# Altium PCB WS2812B灯板.PcbDoc (part 1 of 2)
Units mm, origin at the board's own origin, x right, y up, seen from the top; angles counter-clockwise.
Board outline 76.86 x 65 mm, 2 copper layers (Top Layer, Bottom Layer); 100 components, 337 nets, 606 pads, 0 vias.
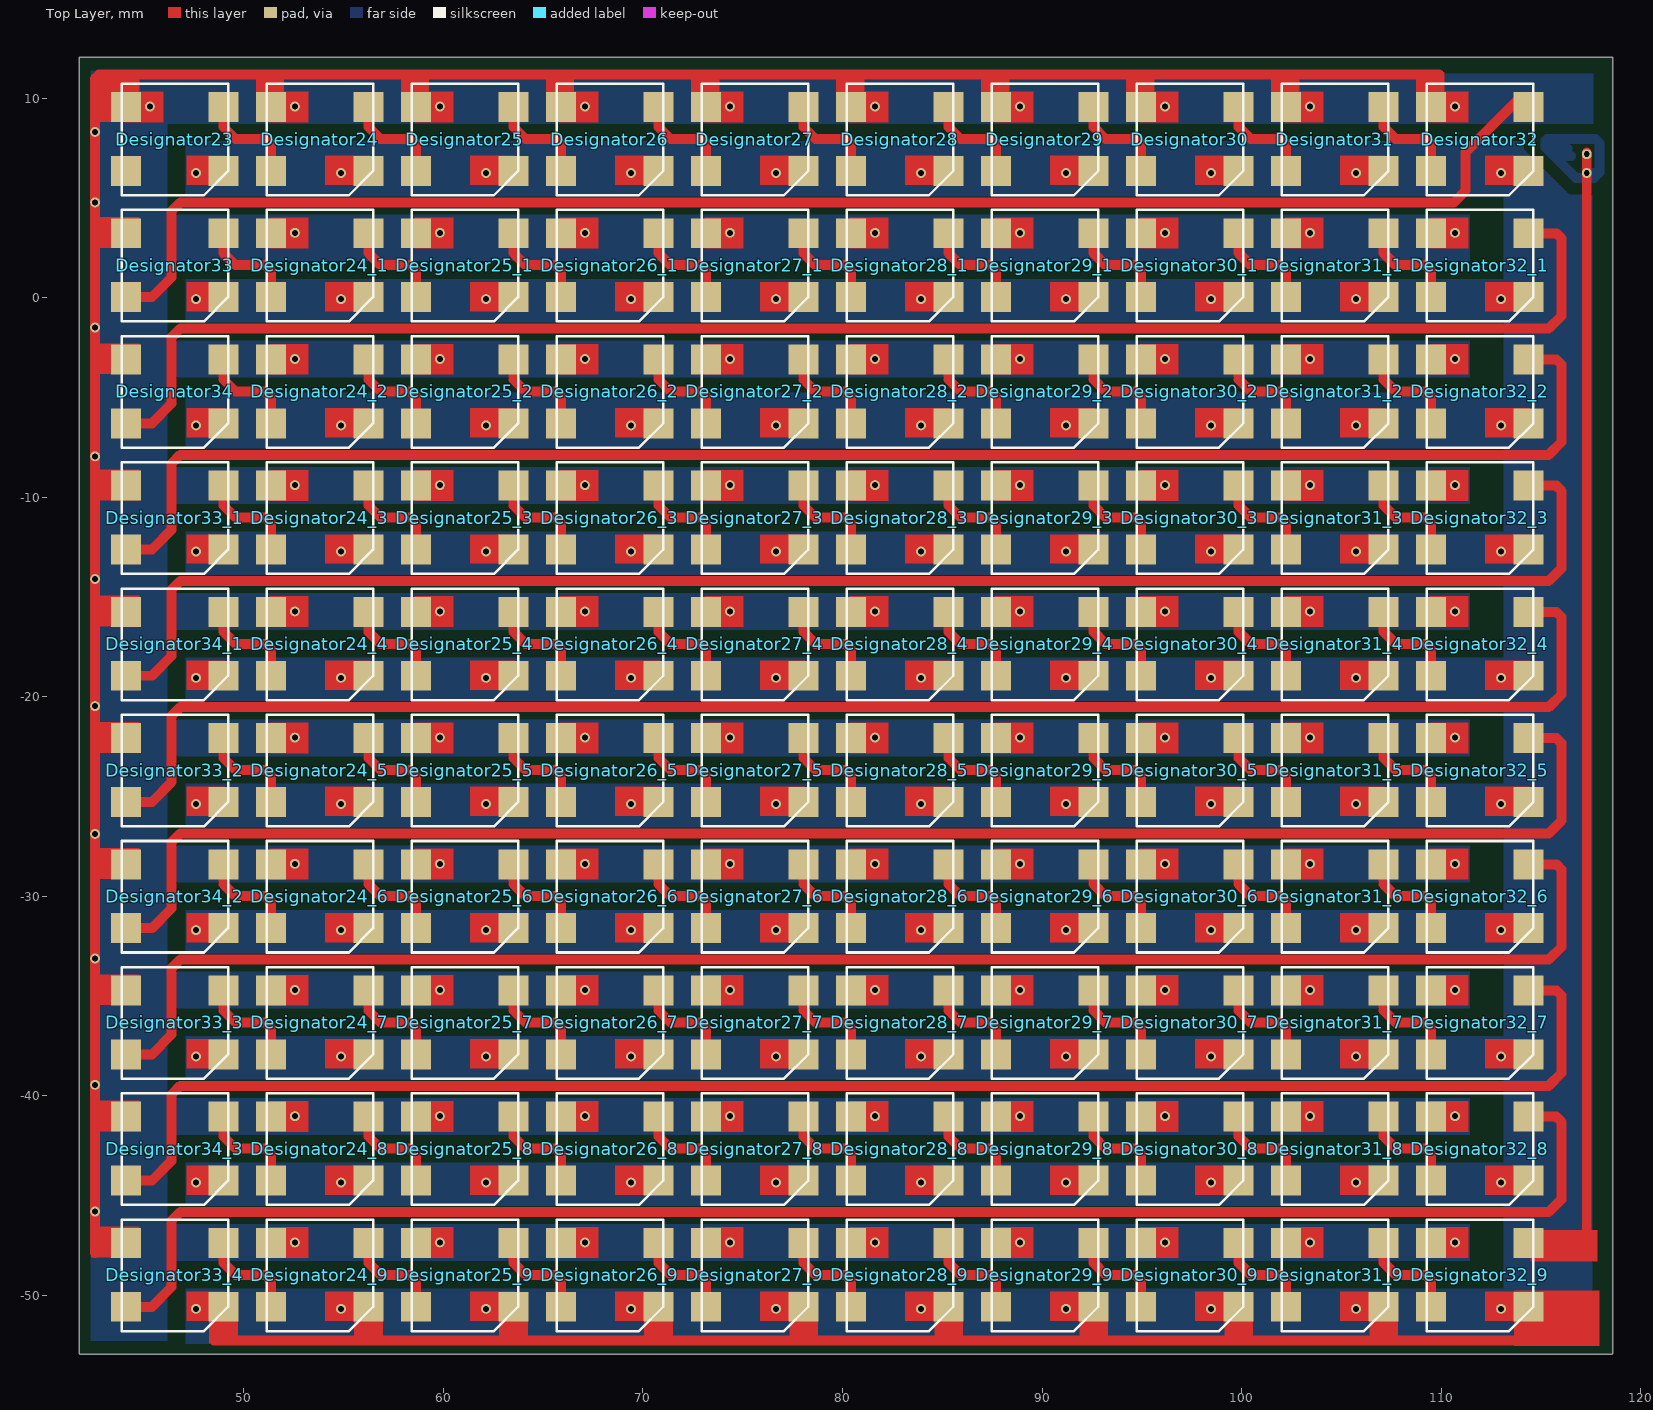
[diagram p0: Top Layer view]
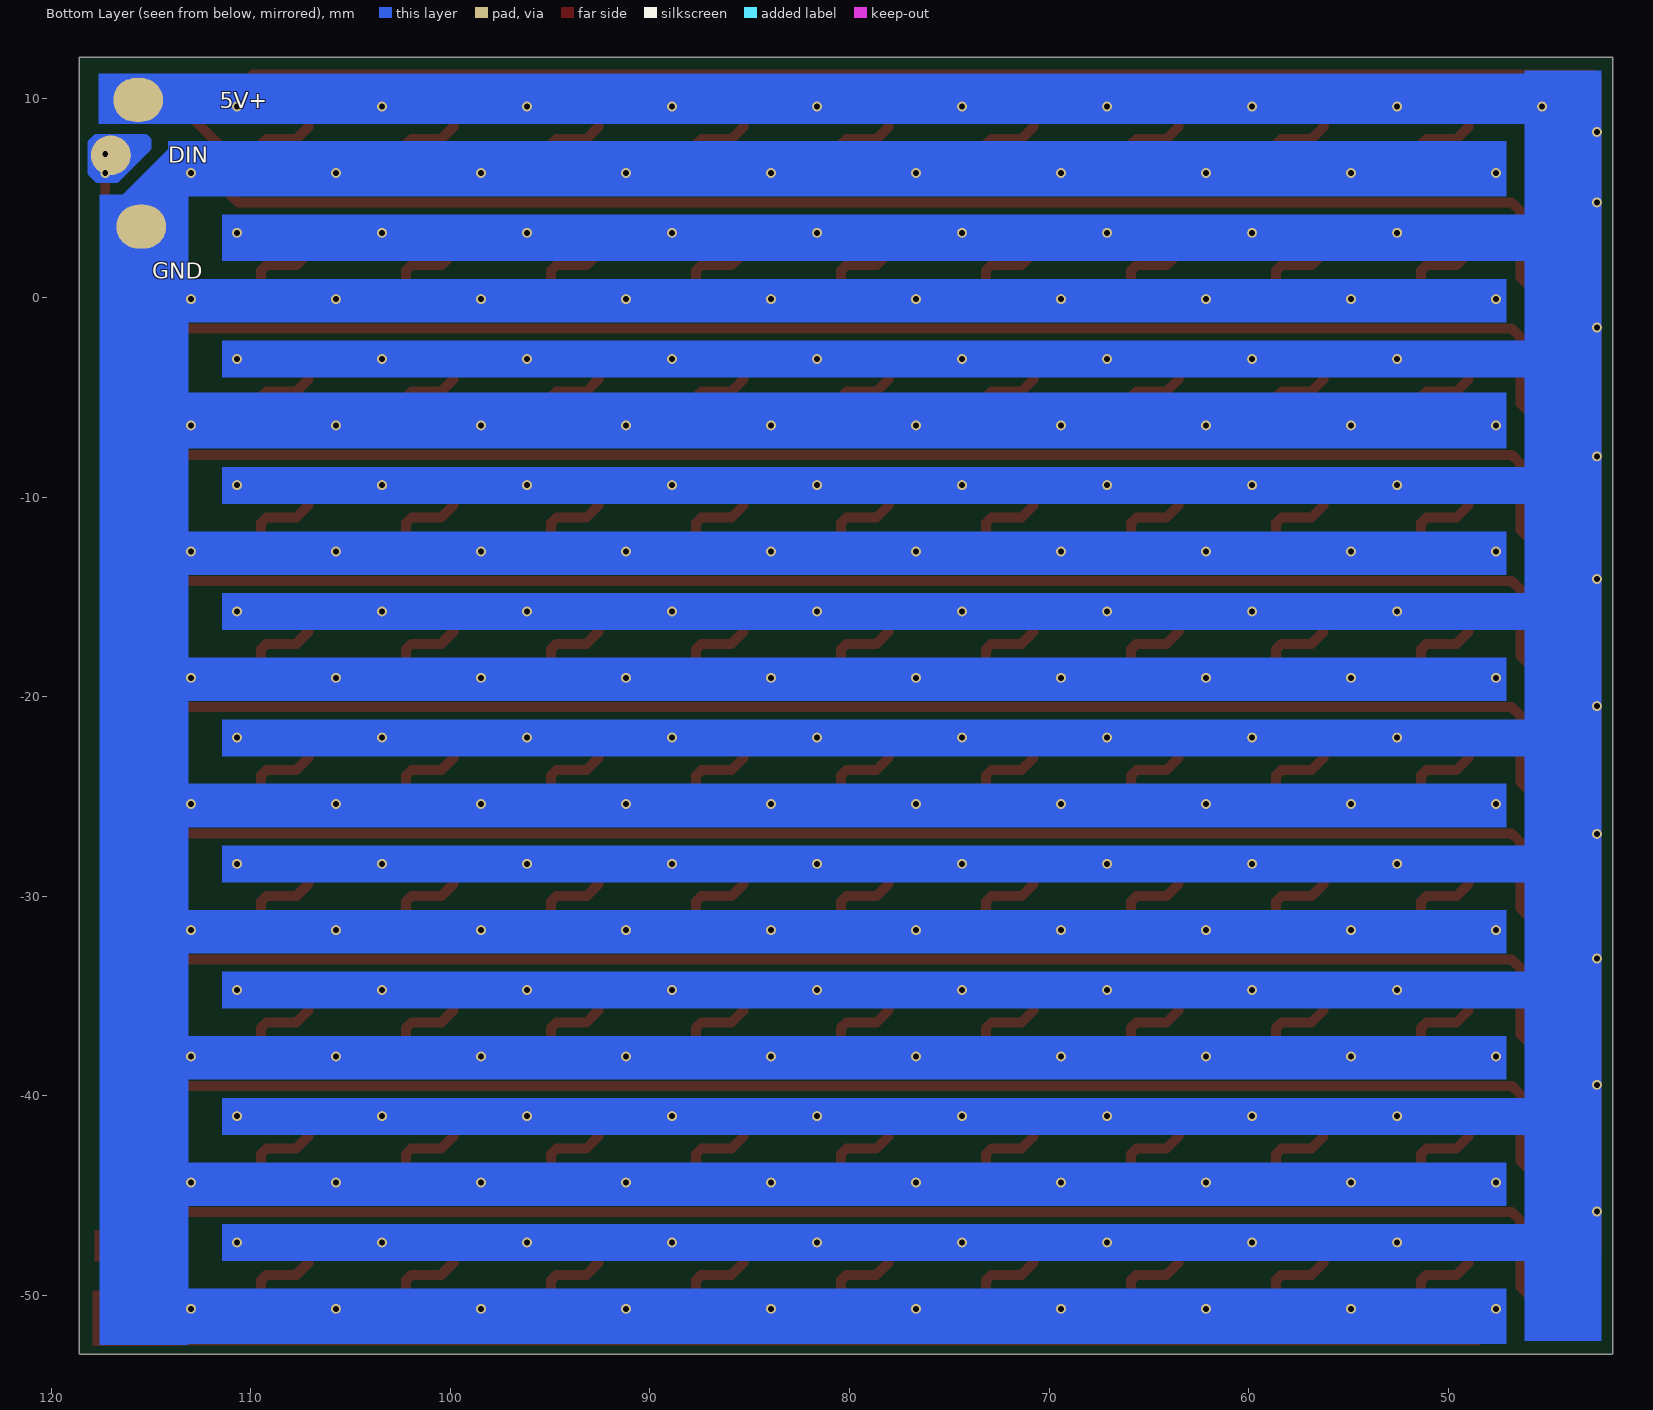
[diagram p1: Bottom Layer view, seen from below]

## Layer stack, top to bottom
Top Layer: signal copper 0.0356
Dielectric: dielectric 0.32, FR-4, Dk 4.8
Bottom Layer: signal copper 0.0356

## Board outline
41.745,-52.883 ccw(c41.808,-52.883) 41.808,-52.947 118.542,-52.947 ccw(c118.542,-52.883) 118.606,-52.883 118.606,11.989 ccw(c118.542,11.989) 118.542,12.053 41.808,12.053 ccw(c41.808,11.989) 41.745,11.989

## Design rules (kind name [scope] priority, off if disabled: settings)
Clearance [All] p1: gap=0.254
PolygonConnect [All] p1: connectstyle=Relief reliefconductorwidth=0.254 reliefentries=4 polygonreliefangle="90 Angle" airgapwidth=0.254
RoutingVias [All] p1: holewidth=0.711 width=1.27 viastyle="Through Hole" minholewidth=0.711 minwidth=1.27 maxholewidth=0.711 maxwidth=1.27
SolderMaskExpansion [All] p1: expansion=0.102
Width [All] p1: maxlimit=30 minlimit=0.254 preferedwidth=0.5
28 further rules are at their usual default settings.

## Components (designator, comment, footprint, x,y, rotation, side; value= is the part's Value field where it differs from the comment)
Designator23 "Comment" "PCBComponent_1 - duplicate8" 46.533,7.95 r0 top
Designator24 "Comment" "PCBComponent_1 - duplicate8" 53.8,7.95 r0 top
Designator24_1 "Comment" "PCBComponent_1 - duplicate8" 53.8,1.626 r0 top
Designator24_2 "Comment" "PCBComponent_1 - duplicate8" 53.8,-4.699 r0 top
Designator24_3 "Comment" "PCBComponent_1 - duplicate8" 53.8,-11.024 r0 top
Designator24_4 "Comment" "PCBComponent_1 - duplicate8" 53.8,-17.348 r0 top
Designator24_5 "Comment" "PCBComponent_1 - duplicate8" 53.8,-23.673 r0 top
Designator24_6 "Comment" "PCBComponent_1 - duplicate8" 53.8,-29.997 r0 top
Designator24_7 "Comment" "PCBComponent_1 - duplicate8" 53.8,-36.322 r0 top
Designator24_8 "Comment" "PCBComponent_1 - duplicate8" 53.8,-42.647 r0 top
Designator24_9 "Comment" "PCBComponent_1 - duplicate8" 53.8,-48.971 r0 top
Designator25 "Comment" "PCBComponent_1 - duplicate8" 61.067,7.95 r0 top
Designator25_1 "Comment" "PCBComponent_1 - duplicate8" 61.067,1.626 r0 top
Designator25_2 "Comment" "PCBComponent_1 - duplicate8" 61.067,-4.699 r0 top
Designator25_3 "Comment" "PCBComponent_1 - duplicate8" 61.067,-11.024 r0 top
Designator25_4 "Comment" "PCBComponent_1 - duplicate8" 61.067,-17.348 r0 top
Designator25_5 "Comment" "PCBComponent_1 - duplicate8" 61.067,-23.673 r0 top
Designator25_6 "Comment" "PCBComponent_1 - duplicate8" 61.067,-29.997 r0 top
Designator25_7 "Comment" "PCBComponent_1 - duplicate8" 61.067,-36.322 r0 top
Designator25_8 "Comment" "PCBComponent_1 - duplicate8" 61.067,-42.647 r0 top
Designator25_9 "Comment" "PCBComponent_1 - duplicate8" 61.067,-48.971 r0 top
Designator26 "Comment" "PCBComponent_1 - duplicate8" 68.334,7.95 r0 top
Designator26_1 "Comment" "PCBComponent_1 - duplicate8" 68.334,1.626 r0 top
Designator26_2 "Comment" "PCBComponent_1 - duplicate8" 68.334,-4.699 r0 top
Designator26_3 "Comment" "PCBComponent_1 - duplicate8" 68.334,-11.024 r0 top
Designator26_4 "Comment" "PCBComponent_1 - duplicate8" 68.334,-17.348 r0 top
Designator26_5 "Comment" "PCBComponent_1 - duplicate8" 68.334,-23.673 r0 top
Designator26_6 "Comment" "PCBComponent_1 - duplicate8" 68.334,-29.997 r0 top
Designator26_7 "Comment" "PCBComponent_1 - duplicate8" 68.334,-36.322 r0 top
Designator26_8 "Comment" "PCBComponent_1 - duplicate8" 68.334,-42.647 r0 top
Designator26_9 "Comment" "PCBComponent_1 - duplicate8" 68.334,-48.971 r0 top
Designator27 "Comment" "PCBComponent_1 - duplicate8" 75.602,7.95 r0 top
Designator27_1 "Comment" "PCBComponent_1 - duplicate8" 75.602,1.626 r0 top
Designator27_2 "Comment" "PCBComponent_1 - duplicate8" 75.602,-4.699 r0 top
Designator27_3 "Comment" "PCBComponent_1 - duplicate8" 75.602,-11.024 r0 top
Designator27_4 "Comment" "PCBComponent_1 - duplicate8" 75.602,-17.348 r0 top
Designator27_5 "Comment" "PCBComponent_1 - duplicate8" 75.602,-23.673 r0 top
Designator27_6 "Comment" "PCBComponent_1 - duplicate8" 75.602,-29.997 r0 top
Designator27_7 "Comment" "PCBComponent_1 - duplicate8" 75.602,-36.322 r0 top
Designator27_8 "Comment" "PCBComponent_1 - duplicate8" 75.602,-42.647 r0 top
Designator27_9 "Comment" "PCBComponent_1 - duplicate8" 75.602,-48.971 r0 top
Designator28 "Comment" "PCBComponent_1 - duplicate8" 82.869,7.95 r0 top
Designator28_1 "Comment" "PCBComponent_1 - duplicate8" 82.869,1.626 r0 top
Designator28_2 "Comment" "PCBComponent_1 - duplicate8" 82.869,-4.699 r0 top
Designator28_3 "Comment" "PCBComponent_1 - duplicate8" 82.869,-11.024 r0 top
Designator28_4 "Comment" "PCBComponent_1 - duplicate8" 82.869,-17.348 r0 top
Designator28_5 "Comment" "PCBComponent_1 - duplicate8" 82.869,-23.673 r0 top
Designator28_6 "Comment" "PCBComponent_1 - duplicate8" 82.869,-29.997 r0 top
Designator28_7 "Comment" "PCBComponent_1 - duplicate8" 82.869,-36.322 r0 top
Designator28_8 "Comment" "PCBComponent_1 - duplicate8" 82.869,-42.647 r0 top
Designator28_9 "Comment" "PCBComponent_1 - duplicate8" 82.869,-48.971 r0 top
Designator29 "Comment" "PCBComponent_1 - duplicate8" 90.136,7.95 r0 top
Designator29_1 "Comment" "PCBComponent_1 - duplicate8" 90.136,1.626 r0 top
Designator29_2 "Comment" "PCBComponent_1 - duplicate8" 90.136,-4.699 r0 top
Designator29_3 "Comment" "PCBComponent_1 - duplicate8" 90.136,-11.024 r0 top
Designator29_4 "Comment" "PCBComponent_1 - duplicate8" 90.136,-17.348 r0 top
Designator29_5 "Comment" "PCBComponent_1 - duplicate8" 90.136,-23.673 r0 top
Designator29_6 "Comment" "PCBComponent_1 - duplicate8" 90.136,-29.997 r0 top
Designator29_7 "Comment" "PCBComponent_1 - duplicate8" 90.136,-36.322 r0 top
Designator29_8 "Comment" "PCBComponent_1 - duplicate8" 90.136,-42.647 r0 top
Designator29_9 "Comment" "PCBComponent_1 - duplicate8" 90.136,-48.971 r0 top
Designator30 "Comment" "PCBComponent_1 - duplicate8" 97.403,7.95 r0 top
Designator30_1 "Comment" "PCBComponent_1 - duplicate8" 97.403,1.626 r0 top
Designator30_2 "Comment" "PCBComponent_1 - duplicate8" 97.403,-4.699 r0 top
Designator30_3 "Comment" "PCBComponent_1 - duplicate8" 97.403,-11.024 r0 top
Designator30_4 "Comment" "PCBComponent_1 - duplicate8" 97.403,-17.348 r0 top
Designator30_5 "Comment" "PCBComponent_1 - duplicate8" 97.403,-23.673 r0 top
Designator30_6 "Comment" "PCBComponent_1 - duplicate8" 97.403,-29.997 r0 top
Designator30_7 "Comment" "PCBComponent_1 - duplicate8" 97.403,-36.322 r0 top
Designator30_8 "Comment" "PCBComponent_1 - duplicate8" 97.403,-42.647 r0 top
Designator30_9 "Comment" "PCBComponent_1 - duplicate8" 97.403,-48.971 r0 top
Designator31 "Comment" "PCBComponent_1 - duplicate8" 104.671,7.95 r0 top
Designator31_1 "Comment" "PCBComponent_1 - duplicate8" 104.671,1.626 r0 top
Designator31_2 "Comment" "PCBComponent_1 - duplicate8" 104.671,-4.699 r0 top
Designator31_3 "Comment" "PCBComponent_1 - duplicate8" 104.671,-11.024 r0 top
Designator31_4 "Comment" "PCBComponent_1 - duplicate8" 104.671,-17.348 r0 top
Designator31_5 "Comment" "PCBComponent_1 - duplicate8" 104.671,-23.673 r0 top
Designator31_6 "Comment" "PCBComponent_1 - duplicate8" 104.671,-29.997 r0 top
Designator31_7 "Comment" "PCBComponent_1 - duplicate8" 104.671,-36.322 r0 top
Designator31_8 "Comment" "PCBComponent_1 - duplicate8" 104.671,-42.647 r0 top
Designator31_9 "Comment" "PCBComponent_1 - duplicate8" 104.671,-48.971 r0 top
Designator32 "Comment" "PCBComponent_1 - duplicate8" 111.938,7.95 r0 top
Designator32_1 "Comment" "PCBComponent_1 - duplicate8" 111.938,1.626 r0 top
Designator32_2 "Comment" "PCBComponent_1 - duplicate8" 111.938,-4.699 r0 top
Designator32_3 "Comment" "PCBComponent_1 - duplicate8" 111.938,-11.024 r0 top
Designator32_4 "Comment" "PCBComponent_1 - duplicate8" 111.938,-17.348 r0 top
Designator32_5 "Comment" "PCBComponent_1 - duplicate8" 111.938,-23.673 r0 top
Designator32_6 "Comment" "PCBComponent_1 - duplicate8" 111.938,-29.997 r0 top
Designator32_7 "Comment" "PCBComponent_1 - duplicate8" 111.938,-36.322 r0 top
Designator32_8 "Comment" "PCBComponent_1 - duplicate8" 111.938,-42.647 r0 top
Designator32_9 "Comment" "PCBComponent_1 - duplicate8" 111.938,-48.971 r0 top
Designator33 "Comment" "PCBComponent_1 - duplicate8" 46.533,1.626 r0 top
Designator33_1 "Comment" "PCBComponent_1 - duplicate8" 46.533,-11.024 r0 top
Designator33_2 "Comment" "PCBComponent_1 - duplicate8" 46.533,-23.673 r0 top
Designator33_3 "Comment" "PCBComponent_1 - duplicate8" 46.533,-36.322 r0 top
Designator33_4 "Comment" "PCBComponent_1 - duplicate8" 46.533,-48.971 r0 top
Designator34 "Comment" "PCBComponent_1 - duplicate8" 46.533,-4.699 r0 top
Designator34_1 "Comment" "PCBComponent_1 - duplicate8" 46.533,-17.348 r0 top
Designator34_2 "Comment" "PCBComponent_1 - duplicate8" 46.533,-29.997 r0 top
Designator34_3 "Comment" "PCBComponent_1 - duplicate8" 46.533,-42.647 r0 top

## Footprints (in the part's own frame and the unit in brackets; to place one, negate y for a bottom-side part, rotate by r counter-clockwise, add the part's x,y. Pads: shape width x height; smd on the part's side, far side on the other; paste and mask are expansions set on the pad)
"PCBComponent_1 - duplicate8" [mm]
  rect 1.5x1.5 smd: DIN(2.45,1.6) DOUT(-2.45,-1.6) GND(2.45,-1.6) VCC(-2.45,1.6)
  silkscreen extent -2.65,-2.82 2.68,2.77

## Free pads (board coordinates)
  round 0.5 hole 0.3: 1(45.288,9.576) 1(52.555,-47.346) 1(52.555,-41.021) 1(52.555,-34.696) 1(52.555,-28.372) 1(52.555,-22.047) 1(52.555,-15.723) 1(52.555,-9.398) 1(52.555,-3.073) 1(52.555,3.251) 1(52.555,9.576) 1(59.823,-47.346) 1(59.823,-41.021) 1(59.823,-34.696) 1(59.823,-28.372) 1(59.823,-22.047) 1(59.823,-15.723) 1(59.823,-9.398) 1(59.823,-3.073) 1(59.823,3.251) 1(59.823,9.576) 1(67.09,-47.346) 1(67.09,-41.021) 1(67.09,-34.696) 1(67.09,-28.372) 1(67.09,-22.047) 1(67.09,-15.723) 1(67.09,-9.398) 1(67.09,-3.073) 1(67.09,3.251) 1(67.09,9.576) 1(74.357,-47.346) 1(74.357,-41.021) 1(74.357,-34.696) 1(74.357,-28.372) 1(74.357,-22.047) 1(74.357,-15.723) 1(74.357,-9.398) 1(74.357,-3.073) 1(74.357,3.251) 1(74.357,9.576) 1(81.624,-47.346) 1(81.624,-41.021) 1(81.624,-34.696) 1(81.624,-28.372) 1(81.624,-22.047) 1(81.624,-15.723) 1(81.624,-9.398) 1(81.624,-3.073) 1(81.624,3.251) 1(81.624,9.576) 1(88.892,-47.346) 1(88.892,-41.021) 1(88.892,-34.696) 1(88.892,-28.372) 1(88.892,-22.047) 1(88.892,-15.723) 1(88.892,-9.398) 1(88.892,-3.073) 1(88.892,3.251) 1(88.892,9.576) 1(96.159,-47.346) 1(96.159,-41.021) 1(96.159,-34.696) 1(96.159,-28.372) 1(96.159,-22.047) 1(96.159,-15.723) 1(96.159,-9.398) 1(96.159,-3.073) 1(96.159,3.251) 1(96.159,9.576) 1(103.426,-47.346) 1(103.426,-41.021) 1(103.426,-34.696) 1(103.426,-28.372) 1(103.426,-22.047) 1(103.426,-15.723) 1(103.426,-9.398) 1(103.426,-3.073) 1(103.426,3.251) 1(103.426,9.576) 1(110.693,-47.346) 1(110.693,-41.021) 1(110.693,-34.696) 1(110.693,-28.372) 1(110.693,-22.047) 1(110.693,-15.723) 1(110.693,-9.398) 1(110.693,-3.073) 1(110.693,3.251) 1(110.693,9.576) 2(42.545,-45.796) 2(42.545,-39.446) 2(42.545,-33.122) 2(42.545,-26.873) 2(42.545,-20.472) 2(42.545,-14.097) 2(42.545,-7.95) 2(42.545,-1.499) 2(42.545,4.775) 2(42.545,8.306) 2(47.6,-50.673) 2(47.6,-44.348) 2(47.6,-38.024) 2(47.6,-31.699) 2(47.6,-25.375) 2(47.6,-19.05) 2(47.6,-12.725) 2(47.6,-6.401) 2(47.6,-0.076) 2(47.6,6.248) 2(54.867,-50.673) 2(54.867,-44.348) 2(54.867,-38.024) 2(54.867,-31.699) 2(54.867,-25.375) 2(54.867,-19.05) 2(54.867,-12.725) 2(54.867,-6.401) 2(54.867,-0.076) 2(54.867,6.248) 2(62.134,-50.673) 2(62.134,-44.348) 2(62.134,-38.024) 2(62.134,-31.699) 2(62.134,-25.375) 2(62.134,-19.05) 2(62.134,-12.725) 2(62.134,-6.401) 2(62.134,-0.076) 2(62.134,6.248) 2(69.401,-50.673) 2(69.401,-44.348) 2(69.401,-38.024) 2(69.401,-31.699) 2(69.401,-25.375) 2(69.401,-19.05) 2(69.401,-12.725) 2(69.401,-6.401) 2(69.401,-0.076) 2(69.401,6.248) 2(76.668,-50.673) 2(76.668,-44.348) 2(76.668,-38.024) 2(76.668,-31.699) 2(76.668,-25.375) 2(76.668,-19.05) 2(76.668,-12.725) 2(76.668,-6.401) 2(76.668,-0.076) 2(76.668,6.248) 2(83.936,-50.673) 2(83.936,-44.348) 2(83.936,-38.024) 2(83.936,-31.699) 2(83.936,-25.375) 2(83.936,-19.05) 2(83.936,-12.725) 2(83.936,-6.401) 2(83.936,-0.076) 2(83.936,6.248) 2(91.203,-50.673) 2(91.203,-44.348) 2(91.203,-38.024) 2(91.203,-31.699) 2(91.203,-25.375) 2(91.203,-19.05) 2(91.203,-12.725) 2(91.203,-6.401) 2(91.203,-0.076) 2(91.203,6.248) 2(98.47,-50.673) 2(98.47,-44.348) 2(98.47,-38.024) 2(98.47,-31.699) 2(98.47,-25.375) 2(98.47,-19.05) 2(98.47,-12.725) 2(98.47,-6.401) 2(98.47,-0.076) 2(98.47,6.248) 2(105.737,-50.673) 2(105.737,-44.348) 2(105.737,-38.024) 2(105.737,-31.699) 2(105.737,-25.375) 2(105.737,-19.05) 2(105.737,-12.725) 2(105.737,-6.401) 2(105.737,-0.076) 2(105.737,6.248) 2(113.005,-50.673) 2(113.005,-44.348) 2(113.005,-38.024) 2(113.005,-31.699) 2(113.005,-25.375) 2(113.005,-19.05) 2(113.005,-12.725) 2(113.005,-6.401) 2(113.005,-0.076) 2(113.005,6.248) 5(117.297,6.248) 5(117.297,7.188)
  oval 2.5x2.2 smd far side: 3(115.494,3.556) 3(115.646,9.906)
  round 2 smd far side: 3(117.018,7.137)

## Nets (pads, with @x,y where several pads share a name; then routed paths per layer and width w, separated by ;. In a path a pad name is that pad's centre, name@x,y a point inside that pad or via, vN(x,y) a via of type N, cw(c..) or ccw(c..) an arc to the next point about the centre after c; other vN are vias at no path point)
NewNet1: 
NewNet2: 
NewNet3: 
NewNet4: 
NewNet5: 
NewNet6: 
NewNet7: 
NewNet8: 
NewNet9: 
NewNet10: 
NewNet11: 
NewNet12: 
NewNet13: 
NewNet14: 
NewNet15: Designator23.VCC Designator24.VCC Designator24_1.VCC Designator24_2.VCC Designator24_3.VCC Designator24_4.VCC Designator24_5.VCC Designator24_6.VCC Designator24_7.VCC Designator24_8.VCC Designator24_9.VCC Designator25.VCC Designator25_1.VCC Designator25_2.VCC Designator25_3.VCC Designator25_4.VCC Designator25_5.VCC Designator25_6.VCC Designator25_7.VCC Designator25_8.VCC Designator25_9.VCC Designator26.VCC Designator26_1.VCC Designator26_2.VCC Designator26_3.VCC Designator26_4.VCC Designator26_5.VCC Designator26_6.VCC Designator26_7.VCC Designator26_8.VCC Designator26_9.VCC Designator27.VCC Designator27_1.VCC Designator27_2.VCC Designator27_3.VCC Designator27_4.VCC Designator27_5.VCC Designator27_6.VCC Designator27_7.VCC Designator27_8.VCC Designator27_9.VCC Designator28.VCC Designator28_1.VCC Designator28_2.VCC Designator28_3.VCC Designator28_4.VCC Designator28_5.VCC Designator28_6.VCC Designator28_7.VCC Designator28_8.VCC Designator28_9.VCC Designator29.VCC Designator29_1.VCC Designator29_2.VCC Designator29_3.VCC Designator29_4.VCC Designator29_5.VCC Designator29_6.VCC Designator29_7.VCC Designator29_8.VCC Designator29_9.VCC Designator30.VCC Designator30_1.VCC Designator30_2.VCC Designator30_3.VCC Designator30_4.VCC Designator30_5.VCC Designator30_6.VCC Designator30_7.VCC Designator30_8.VCC Designator30_9.VCC Designator31.VCC Designator31_1.VCC Designator31_2.VCC Designator31_3.VCC Designator31_4.VCC Designator31_5.VCC Designator31_6.VCC Designator31_7.VCC Designator31_8.VCC Designator31_9.VCC Designator32.VCC Designator32_1.VCC Designator32_2.VCC Designator32_3.VCC Designator32_4.VCC Designator32_5.VCC Designator32_6.VCC Designator32_7.VCC Designator32_8.VCC Designator32_9.VCC Designator33.VCC Designator33_1.VCC Designator33_2.VCC Designator33_3.VCC Designator33_4.VCC Designator34.VCC Designator34_1.VCC Designator34_2.VCC Designator34_3.VCC pad.1 pad.2@42.545,4.775 pad.2@42.545,8.306 pad.2@42.545,-1.499 pad.2@42.545,-7.95 pad.2@42.545,-14.097 pad.2@42.545,-20.472 pad.2@42.545,-26.873 pad.2@42.545,-33.122 pad.2@42.545,-39.446 pad.2@42.545,-45.796 pad.3@115.646,9.906 | length 126.8
  Top Layer w0.5: 42.545,-47.879 42.545,10.973 42.748,11.176 109.906,11.176 ; Designator23.VCC@43.561,9.55 Designator23.VCC@44.083,9.55
NewNet16: Designator24_9.DIN Designator25_9.DOUT | length 5.1
  Top Layer w0.5: Designator24_9.DIN@56.25,-47.371 56.25,-48.37 56.851,-48.971 58.349,-48.971 58.617,-49.239 Designator25_9.DOUT@58.617,-50.571
NewNet17: Designator24_9.DOUT Designator33_4.DIN | length 5.1
  Top Layer w0.5: Designator33_4.DIN@48.983,-47.371 48.983,-48.37 49.584,-48.971 51.082,-48.971 51.35,-49.239 Designator24_9.DOUT@51.35,-50.571
NewNet18: Designator23.GND Designator24.GND Designator24_1.GND Designator24_2.GND Designator24_3.GND Designator24_4.GND Designator24_5.GND Designator24_6.GND Designator24_7.GND Designator24_8.GND Designator24_9.GND Designator25.GND Designator25_1.GND Designator25_2.GND Designator25_3.GND Designator25_4.GND Designator25_5.GND Designator25_6.GND Designator25_7.GND Designator25_8.GND Designator25_9.GND Designator26.GND Designator26_1.GND Designator26_2.GND Designator26_3.GND Designator26_4.GND Designator26_5.GND Designator26_6.GND Designator26_7.GND Designator26_8.GND Designator26_9.GND Designator27.GND Designator27_1.GND Designator27_2.GND Designator27_3.GND Designator27_4.GND Designator27_5.GND Designator27_6.GND Designator27_7.GND Designator27_8.GND Designator27_9.GND Designator28.GND Designator28_1.GND Designator28_2.GND Designator28_3.GND Designator28_4.GND Designator28_5.GND Designator28_6.GND Designator28_7.GND Designator28_8.GND Designator28_9.GND Designator29.GND Designator29_1.GND Designator29_2.GND Designator29_3.GND Designator29_4.GND Designator29_5.GND Designator29_6.GND Designator29_7.GND Designator29_8.GND Designator29_9.GND Designator30.GND Designator30_1.GND Designator30_2.GND Designator30_3.GND Designator30_4.GND Designator30_5.GND Designator30_6.GND Designator30_7.GND Designator30_8.GND Designator30_9.GND Designator31.GND Designator31_1.GND Designator31_2.GND Designator31_3.GND Designator31_4.GND Designator31_5.GND Designator31_6.GND Designator31_7.GND Designator31_8.GND Designator31_9.GND Designator32.GND Designator32_1.GND Designator32_2.GND Designator32_3.GND Designator32_4.GND Designator32_5.GND Designator32_6.GND Designator32_7.GND Designator32_8.GND Designator32_9.GND Designator33.GND Designator33_1.GND Designator33_2.GND Designator33_3.GND Designator33_4.GND Designator34.GND Designator34_1.GND Designator34_2.GND Designator34_3.GND pad.2@47.6,6.248 pad.2@47.6,-0.076 pad.2@47.6,-6.401 pad.2@47.6,-12.725 pad.2@47.6,-19.05 pad.2@47.6,-25.375 pad.2@47.6,-31.699 pad.2@47.6,-38.024 pad.2@47.6,-44.348 pad.2@47.6,-50.673 pad.2@54.867,6.248 pad.2@54.867,-0.076 pad.2@54.867,-6.401 pad.2@54.867,-12.725 pad.2@54.867,-19.05 pad.2@54.867,-25.375 pad.2@54.867,-31.699 pad.2@54.867,-38.024 pad.2@54.867,-44.348 pad.2@54.867,-50.673 pad.2@62.134,6.248 pad.2@62.134,-0.076 pad.2@62.134,-6.401 pad.2@62.134,-12.725 pad.2@62.134,-19.05 pad.2@62.134,-25.375 pad.2@62.134,-31.699 pad.2@62.134,-38.024 pad.2@62.134,-44.348 pad.2@62.134,-50.673 pad.2@69.401,6.248 pad.2@69.401,-0.076 pad.2@69.401,-6.401 pad.2@69.401,-12.725 pad.2@69.401,-19.05 pad.2@69.401,-25.375 pad.2@69.401,-31.699 pad.2@69.401,-38.024 pad.2@69.401,-44.348 pad.2@69.401,-50.673 pad.2@76.668,6.248 pad.2@76.668,-0.076 pad.2@76.668,-6.401 pad.2@76.668,-12.725 pad.2@76.668,-19.05 pad.2@76.668,-25.375 pad.2@76.668,-31.699 pad.2@76.668,-38.024 pad.2@76.668,-44.348 pad.2@76.668,-50.673 pad.2@83.936,6.248 pad.2@83.936,-0.076 pad.2@83.936,-6.401 pad.2@83.936,-12.725 pad.2@83.936,-19.05 pad.2@83.936,-25.375 pad.2@83.936,-31.699 pad.2@83.936,-38.024 pad.2@83.936,-44.348 pad.2@83.936,-50.673 pad.2@91.203,6.248 pad.2@91.203,-0.076 pad.2@91.203,-6.401 pad.2@91.203,-12.725 pad.2@91.203,-19.05 pad.2@91.203,-25.375 pad.2@91.203,-31.699 pad.2@91.203,-38.024 pad.2@91.203,-44.348 pad.2@91.203,-50.673 pad.2@98.47,6.248 pad.2@98.47,-0.076 pad.2@98.47,-6.401 pad.2@98.47,-12.725 pad.2@98.47,-19.05 pad.2@98.47,-25.375 pad.2@98.47,-31.699 pad.2@98.47,-38.024 pad.2@98.47,-44.348 pad.2@98.47,-50.673 pad.2@105.737,6.248 pad.2@105.737,-0.076 pad.2@105.737,-6.401 pad.2@105.737,-12.725 pad.2@105.737,-19.05 pad.2@105.737,-25.375 pad.2@105.737,-31.699 pad.2@105.737,-38.024 pad.2@105.737,-44.348 pad.2@105.737,-50.673 pad.2@113.005,6.248 pad.2@113.005,-0.076 pad.2@113.005,-6.401 pad.2@113.005,-12.725 pad.2@113.005,-19.05 pad.2@113.005,-25.375 pad.2@113.005,-31.699 pad.2@113.005,-38.024 pad.2@113.005,-44.348 pad.2@113.005,-50.673 pad.3@115.494,3.556 | length 78.8
  Top Layer w0.5: 48.514,-52.273 115.468,-52.273 ; Designator33_4.GND@48.983,-51.32 Designator33_4.GND@48.983,-50.571
  Bottom Layer w0.5: 113.132,7.01 115.367,4.775 ; 113.538,7.214 115.926,4.826 ; 113.843,7.391 116.357,4.877 ; 114.046,5.563 114.732,4.877
NewNet19: Designator25_9.DIN Designator26_9.DOUT | length 5.1
  Top Layer w0.5: Designator25_9.DIN@63.517,-47.371 63.517,-48.37 64.118,-48.971 65.617,-48.971 65.884,-49.239 Designator26_9.DOUT@65.884,-50.571
NewNet20: Designator26_9.DIN Designator27_9.DOUT | length 5.1
  Top Layer w0.5: Designator26_9.DIN@70.784,-47.371 70.784,-48.37 71.385,-48.971 72.884,-48.971 73.152,-49.239 Designator27_9.DOUT@73.152,-50.571
NewNet21: Designator27_9.DIN Designator28_9.DOUT | length 5.1
  Top Layer w0.5: Designator27_9.DIN@78.052,-47.371 78.052,-48.37 78.653,-48.971 80.151,-48.971 80.419,-49.239 Designator28_9.DOUT@80.419,-50.571
NewNet22: Designator28_9.DIN Designator29_9.DOUT | length 5.1
  Top Layer w0.5: Designator28_9.DIN@85.319,-47.371 85.319,-48.37 85.92,-48.971 87.418,-48.971 87.686,-49.239 Designator29_9.DOUT@87.686,-50.571
NewNet23: Designator29_9.DIN Designator30_9.DOUT | length 5.1
  Top Layer w0.5: Designator29_9.DIN@92.586,-47.371 92.586,-48.37 93.187,-48.971 94.686,-48.971 94.953,-49.239 Designator30_9.DOUT@94.953,-50.571
NewNet24: Designator30_9.DIN Designator31_9.DOUT | length 5.1
  Top Layer w0.5: Designator30_9.DIN@99.853,-47.371 99.853,-48.37 100.454,-48.971 101.953,-48.971 102.221,-49.239 Designator31_9.DOUT@102.221,-50.571
NewNet25: Designator31_9.DIN Designator32_9.DOUT | length 5.1
  Top Layer w0.5: Designator31_9.DIN@107.121,-47.371 107.121,-48.37 107.721,-48.971 109.22,-48.971 109.488,-49.239 Designator32_9.DOUT@109.488,-50.571
NewNet26: Designator24_8.DIN Designator25_8.DOUT | length 5.1
  Top Layer w0.5: Designator24_8.DIN@56.25,-41.047 56.25,-42.046 56.851,-42.647 58.349,-42.647 58.617,-42.914 Designator25_8.DOUT@58.617,-44.247
NewNet27: Designator24_8.DOUT Designator34_3.DIN | length 5.1
  Top Layer w0.5: Designator34_3.DIN@48.983,-41.047 48.983,-42.046 49.584,-42.647 51.082,-42.647 51.35,-42.914 Designator24_8.DOUT@51.35,-44.247
NewNet28: Designator25_8.DIN Designator26_8.DOUT | length 5.1
  Top Layer w0.5: Designator25_8.DIN@63.517,-41.047 63.517,-42.046 64.118,-42.647 65.617,-42.647 65.884,-42.914 Designator26_8.DOUT@65.884,-44.247
NewNet29: Designator26_8.DIN Designator27_8.DOUT | length 5.1
  Top Layer w0.5: Designator26_8.DIN@70.784,-41.047 70.784,-42.046 71.385,-42.647 72.884,-42.647 73.152,-42.914 Designator27_8.DOUT@73.152,-44.247
NewNet30: Designator27_8.DIN Designator28_8.DOUT | length 5.1
  Top Layer w0.5: Designator27_8.DIN@78.052,-41.047 78.052,-42.046 78.653,-42.647 80.151,-42.647 80.419,-42.914 Designator28_8.DOUT@80.419,-44.247
NewNet31: Designator28_8.DIN Designator29_8.DOUT | length 5.1
  Top Layer w0.5: Designator28_8.DIN@85.319,-41.047 85.319,-42.046 85.92,-42.647 87.418,-42.647 87.686,-42.914 Designator29_8.DOUT@87.686,-44.247
NewNet32: Designator29_8.DIN Designator30_8.DOUT | length 5.1
  Top Layer w0.5: Designator29_8.DIN@92.586,-41.047 92.586,-42.046 93.187,-42.647 94.686,-42.647 94.953,-42.914 Designator30_8.DOUT@94.953,-44.247
NewNet33: Designator30_8.DIN Designator31_8.DOUT | length 5.1
  Top Layer w0.5: Designator30_8.DIN@99.853,-41.047 99.853,-42.046 100.454,-42.647 101.953,-42.647 102.221,-42.914 Designator31_8.DOUT@102.221,-44.247
NewNet34: Designator31_8.DIN Designator32_8.DOUT | length 5.1
  Top Layer w0.5: Designator31_8.DIN@107.121,-41.047 107.121,-42.046 107.721,-42.647 109.22,-42.647 109.488,-42.914 Designator32_8.DOUT@109.488,-44.247
NewNet35: Designator32_8.DIN Designator33_4.DOUT | length 81.8
  Top Layer w0.5: Designator33_4.DOUT@44.083,-50.571 45.39,-50.571 46.38,-49.581 46.38,-46.253 46.812,-45.822 115.392,-45.822 116.027,-45.187 116.027,-41.3 115.773,-41.047 Designator32_8.DIN@114.388,-41.047
NewNet36: Designator24_7.DIN Designator25_7.DOUT | length 5.1
  Top Layer w0.5: Designator24_7.DIN@56.25,-34.722 56.25,-35.721 56.851,-36.322 58.349,-36.322 58.617,-36.59 Designator25_7.DOUT@58.617,-37.922
NewNet37: Designator24_7.DOUT Designator33_3.DIN | length 5.1
  Top Layer w0.5: Designator33_3.DIN@48.983,-34.722 48.983,-35.721 49.584,-36.322 51.082,-36.322 51.35,-36.59 Designator24_7.DOUT@51.35,-37.922
NewNet38: Designator25_7.DIN Designator26_7.DOUT | length 5.1
  Top Layer w0.5: Designator25_7.DIN@63.517,-34.722 63.517,-35.721 64.118,-36.322 65.617,-36.322 65.884,-36.59 Designator26_7.DOUT@65.884,-37.922
NewNet39: Designator26_7.DIN Designator27_7.DOUT | length 5.1
  Top Layer w0.5: Designator26_7.DIN@70.784,-34.722 70.784,-35.721 71.385,-36.322 72.884,-36.322 73.152,-36.59 Designator27_7.DOUT@73.152,-37.922
NewNet40: Designator27_7.DIN Designator28_7.DOUT | length 5.1
  Top Layer w0.5: Designator27_7.DIN@78.052,-34.722 78.052,-35.721 78.653,-36.322 80.151,-36.322 80.419,-36.59 Designator28_7.DOUT@80.419,-37.922
NewNet41: Designator28_7.DIN Designator29_7.DOUT | length 5.1
  Top Layer w0.5: Designator28_7.DIN@85.319,-34.722 85.319,-35.721 85.92,-36.322 87.418,-36.322 87.686,-36.59 Designator29_7.DOUT@87.686,-37.922
NewNet42: Designator29_7.DIN Designator30_7.DOUT | length 5.1
  Top Layer w0.5: Designator29_7.DIN@92.586,-34.722 92.586,-35.721 93.187,-36.322 94.686,-36.322 94.953,-36.59 Designator30_7.DOUT@94.953,-37.922
NewNet43: Designator30_7.DIN Designator31_7.DOUT | length 5.1
  Top Layer w0.5: Designator30_7.DIN@99.853,-34.722 99.853,-35.721 100.454,-36.322 101.953,-36.322 102.221,-36.59 Designator31_7.DOUT@102.221,-37.922
NewNet44: Designator31_7.DIN Designator32_7.DOUT | length 5.1
  Top Layer w0.5: Designator31_7.DIN@107.121,-34.722 107.121,-35.721 107.721,-36.322 109.22,-36.322 109.488,-36.59 Designator32_7.DOUT@109.488,-37.922
NewNet45: Designator32_7.DIN Designator34_3.DOUT | length 81.8
  Top Layer w0.5: Designator34_3.DOUT@44.083,-44.247 45.39,-44.247 46.38,-43.256 46.38,-39.929 46.812,-39.497 115.392,-39.497 116.027,-38.862 116.027,-34.976 115.773,-34.722 Designator32_7.DIN@114.388,-34.722
NewNet46: Designator24_6.DIN Designator25_6.DOUT | length 5.1
  Top Layer w0.5: Designator24_6.DIN@56.25,-28.397 56.25,-29.397 56.851,-29.997 58.349,-29.997 58.617,-30.265 Designator25_6.DOUT@58.617,-31.597
NewNet47: Designator24_6.DOUT Designator34_2.DIN | length 5.1
  Top Layer w0.5: Designator34_2.DIN@48.983,-28.397 48.983,-29.397 49.584,-29.997 51.082,-29.997 51.35,-30.265 Designator24_6.DOUT@51.35,-31.597
NewNet48: Designator25_6.DIN Designator26_6.DOUT | length 5.1
  Top Layer w0.5: Designator25_6.DIN@63.517,-28.397 63.517,-29.397 64.118,-29.997 65.617,-29.997 65.884,-30.265 Designator26_6.DOUT@65.884,-31.597
NewNet49: Designator26_6.DIN Designator27_6.DOUT | length 5.1
  Top Layer w0.5: Designator26_6.DIN@70.784,-28.397 70.784,-29.397 71.385,-29.997 72.884,-29.997 73.152,-30.265 Designator27_6.DOUT@73.152,-31.597
NewNet50: Designator27_6.DIN Designator28_6.DOUT | length 5.1
  Top Layer w0.5: Designator27_6.DIN@78.052,-28.397 78.052,-29.397 78.653,-29.997 80.151,-29.997 80.419,-30.265 Designator28_6.DOUT@80.419,-31.597
NewNet51: Designator28_6.DIN Designator29_6.DOUT | length 5.1
  Top Layer w0.5: Designator28_6.DIN@85.319,-28.397 85.319,-29.397 85.92,-29.997 87.418,-29.997 87.686,-30.265 Designator29_6.DOUT@87.686,-31.597
NewNet52: Designator29_6.DIN Designator30_6.DOUT | length 5.1
  Top Layer w0.5: Designator29_6.DIN@92.586,-28.397 92.586,-29.397 93.187,-29.997 94.686,-29.997 94.953,-30.265 Designator30_6.DOUT@94.953,-31.597
NewNet53: Designator30_6.DIN Designator31_6.DOUT | length 5.1
  Top Layer w0.5: Designator30_6.DIN@99.853,-28.397 99.853,-29.397 100.454,-29.997 101.953,-29.997 102.221,-30.265 Designator31_6.DOUT@102.221,-31.597
NewNet54: Designator31_6.DIN Designator32_6.DOUT | length 5.1
  Top Layer w0.5: Designator31_6.DIN@107.121,-28.397 107.121,-29.397 107.721,-29.997 109.22,-29.997 109.488,-30.265 Designator32_6.DOUT@109.488,-31.597
NewNet55: Designator32_6.DIN Designator33_3.DOUT | length 81.8
  Top Layer w0.5: Designator33_3.DOUT@44.083,-37.922 45.39,-37.922 46.38,-36.932 46.38,-33.604 46.812,-33.172 115.392,-33.172 116.027,-32.537 116.027,-28.651 115.773,-28.397 Designator32_6.DIN@114.388,-28.397
NewNet56: Designator24_5.DIN Designator25_5.DOUT | length 5.1
  Top Layer w0.5: Designator24_5.DIN@56.25,-22.073 56.25,-23.072 56.851,-23.673 58.349,-23.673 58.617,-23.941 Designator25_5.DOUT@58.617,-25.273
NewNet57: Designator24_5.DOUT Designator33_2.DIN | length 5.1
  Top Layer w0.5: Designator33_2.DIN@48.983,-22.073 48.983,-23.072 49.584,-23.673 51.082,-23.673 51.35,-23.941 Designator24_5.DOUT@51.35,-25.273
NewNet58: Designator25_5.DIN Designator26_5.DOUT | length 5.1
  Top Layer w0.5: Designator25_5.DIN@63.517,-22.073 63.517,-23.072 64.118,-23.673 65.617,-23.673 65.884,-23.941 Designator26_5.DOUT@65.884,-25.273
NewNet59: Designator26_5.DIN Designator27_5.DOUT | length 5.1
  Top Layer w0.5: Designator26_5.DIN@70.784,-22.073 70.784,-23.072 71.385,-23.673 72.884,-23.673 73.152,-23.941 Designator27_5.DOUT@73.152,-25.273
NewNet60: Designator27_5.DIN Designator28_5.DOUT | length 5.1
  Top Layer w0.5: Designator27_5.DIN@78.052,-22.073 78.052,-23.072 78.653,-23.673 80.151,-23.673 80.419,-23.941 Designator28_5.DOUT@80.419,-25.273
NewNet61: Designator28_5.DIN Designator29_5.DOUT | length 5.1
  Top Layer w0.5: Designator28_5.DIN@85.319,-22.073 85.319,-23.072 85.92,-23.673 87.418,-23.673 87.686,-23.941 Designator29_5.DOUT@87.686,-25.273
NewNet62: Designator29_5.DIN Designator30_5.DOUT | length 5.1
  Top Layer w0.5: Designator29_5.DIN@92.586,-22.073 92.586,-23.072 93.187,-23.673 94.686,-23.673 94.953,-23.941 Designator30_5.DOUT@94.953,-25.273
NewNet63: Designator30_5.DIN Designator31_5.DOUT | length 5.1
  Top Layer w0.5: Designator30_5.DIN@99.853,-22.073 99.853,-23.072 100.454,-23.673 101.953,-23.673 102.221,-23.941 Designator31_5.DOUT@102.221,-25.273
NewNet64: Designator31_5.DIN Designator32_5.DOUT | length 5.1
  Top Layer w0.5: Designator31_5.DIN@107.121,-22.073 107.121,-23.072 107.721,-23.673 109.22,-23.673 109.488,-23.941 Designator32_5.DOUT@109.488,-25.273
NewNet65: Designator32_5.DIN Designator34_2.DOUT | length 81.8
  Top Layer w0.5: Designator34_2.DOUT@44.083,-31.597 45.39,-31.597 46.38,-30.607 46.38,-27.28 46.812,-26.848 115.392,-26.848 116.027,-26.213 116.027,-22.327 115.773,-22.073 Designator32_5.DIN@114.388,-22.073
NewNet66: Designator24_4.DIN Designator25_4.DOUT | length 5.1
  Top Layer w0.5: Designator24_4.DIN@56.25,-15.748 56.25,-16.747 56.851,-17.348 58.349,-17.348 58.617,-17.616 Designator25_4.DOUT@58.617,-18.948